# Altium PCB PCB1.PcbDoc
Units mil, origin at the board's own origin, x right, y up, seen from the top; angles counter-clockwise.
Board outline 728.35 x 1259.84 mil, 2 copper layers (Top Layer, Bottom Layer); 18 components, 0 nets, 43 pads, 32 vias.
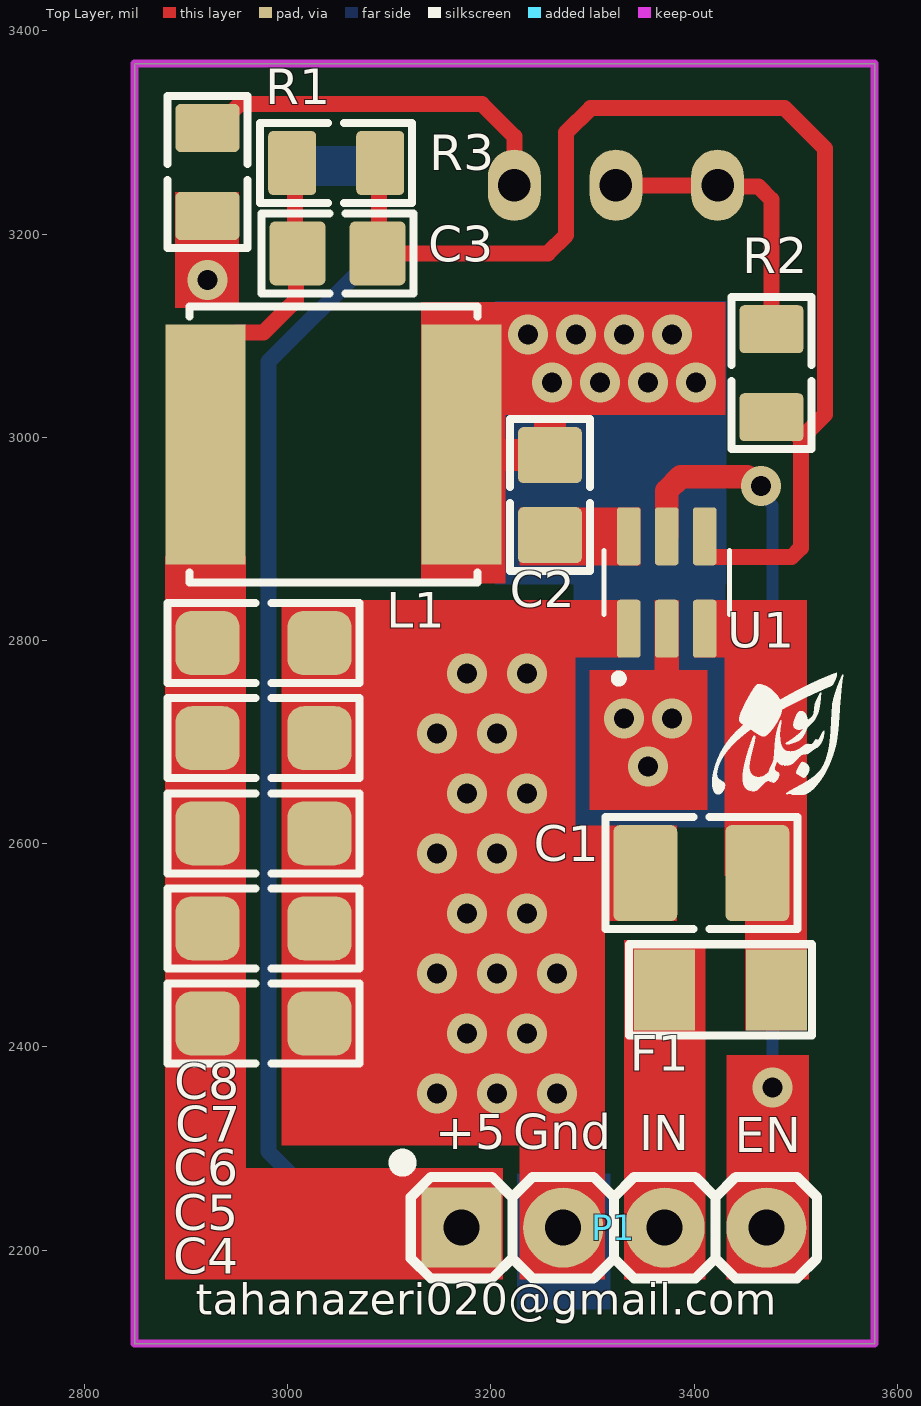
[diagram p0: Top Layer view]
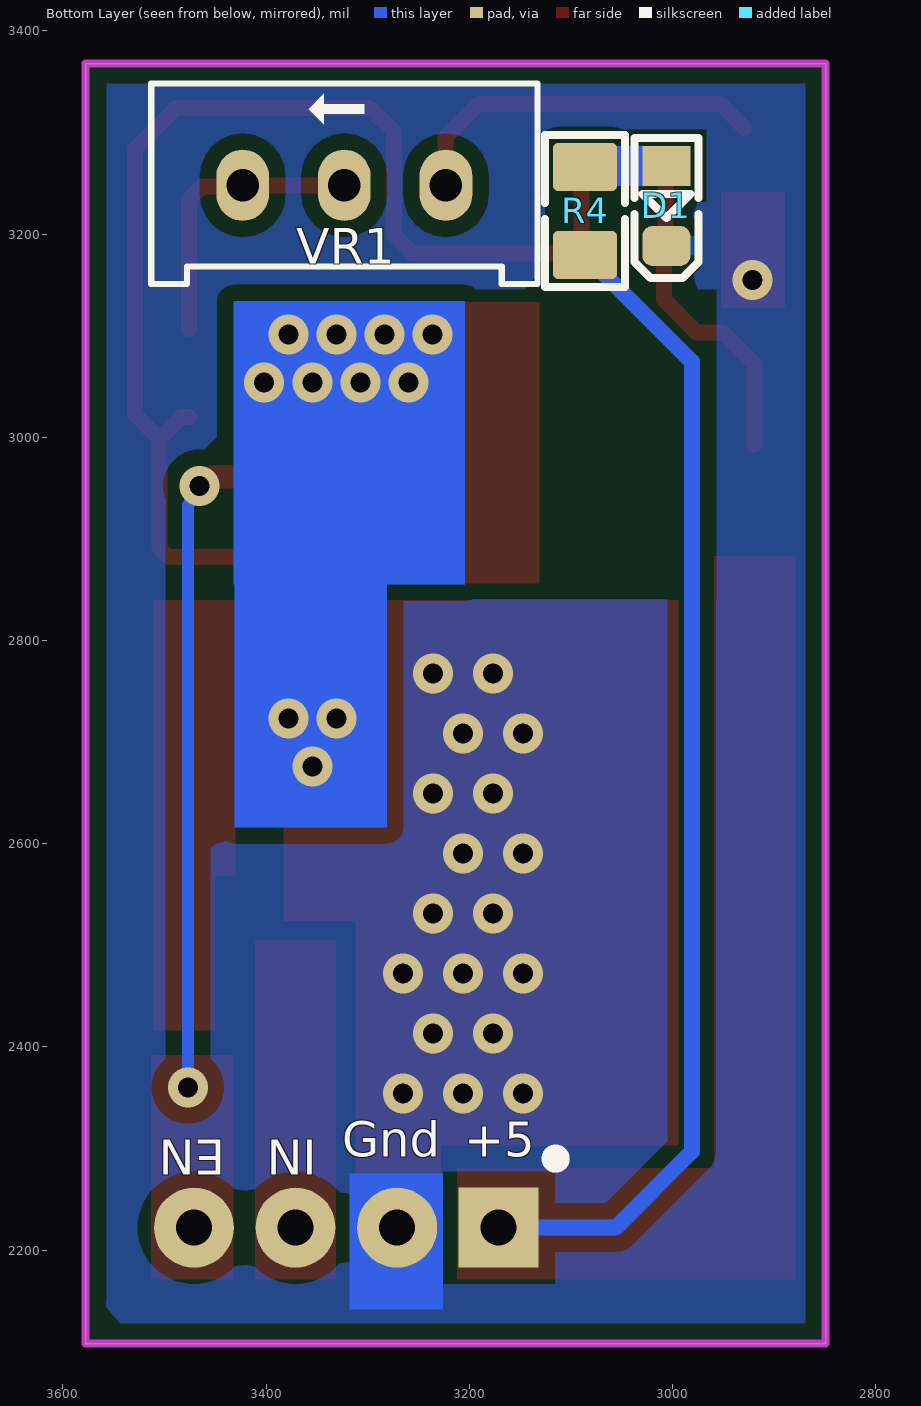
[diagram p1: Bottom Layer view, seen from below]

## Layer stack, top to bottom
Top Solder: solder mask 0.4, Solder Resist, Dk 3.5
Top Layer: signal copper 1.4
Dielectric 1: dielectric 12.6, FR-4, Dk 4.8
Bottom Layer: signal copper 1.4
Bottom Solder: solder mask 0.4, Solder Resist, Dk 3.5

## Board outline
2849.34,2108 3577.69,2108 3577.69,3367.84 2849.34,3367.84

## Design rules (kind name [scope] priority, off if disabled: settings)
Clearance [All] p1: gap=10 ignorepadtopadclearanceinfootprint=FALSE
PolygonConnect [All] p1: connectstyle=Relief reliefconductorwidth=10 reliefentries=4 polygonreliefangle="90 Angle" airgapwidth=10
RoutingVias [All] p1: holewidth=28 width=50 viastyle="Through Hole" minholewidth=28 minwidth=50 maxholewidth=28 maxwidth=50
SolderMaskExpansion [All] p1: expansion=4 istentingtop=FALSE
Width [All] p1: maxlimit=10 minlimit=10 preferedwidth=10
30 further rules are at their usual default settings.

## Components (designator, comment, footprint, x,y, rotation, side; value= is the part's Value field where it differs from the comment)
C1 "Capacitor SMD 1206" C1206E 3407,2571 r0 top value=10uF
C2 "Capacitor SMD 0805" C0805E 3258,2943 r270 top value=100nf
C3 "Capacitor SMD 0805" C0805E 3049,3181 r180 top value=47pF
C4 "Capacitor SMD 1206" C1206 2976.13,2423 r180 top value=10uF
C5 "Capacitor SMD 1206" C1206 2976.13,2516.61 r180 top value=10uF
C6 "Capacitor SMD 1206" C1206 2976.13,2610.23 r180 top value=10uF
C7 "Capacitor SMD 1206" C1206 2976.13,2703.84 r180 top value=10uF
C8 "Capacitor SMD 1206" C1206 2976.13,2797.46 r180 top value=10uF
D1 "LED SMD 0805" "LED SMD 0805 (Blue)" 3006,3227.63 r270 bottom
F1 "Resistor SMD 1206" SMD-1206-RES 3426,2456 r90 top value=3A
L1 "Inductor SMD Cored" L7 3045.02,2993 r180 top value=15uH
P1 "Male Header Single 04" MHDR1X04-254P 3171,2222 r0 top
R1 "Resistor SMD 0805" R0805E 3047.69,3270 r180 top value=100K
R2 "Resistor SMD 0805" R0805E 3476,3063 r90 top value=1K
R3 "Resistor SMD 0805" R0805E 2921,3261 r90 top value=1K
R4 "Resistor SMD 0805" R0805E 3086,3222.69 r270 bottom value=10K
U1 "TPS54202DDCR" SOT95P280X110-6N 3373,2857 r90 top
VR1 "Potentiometr Trimer / Multi Turn THD" 3296W 3323,3248 r0 bottom value=10K

## Footprints (in the part's own frame and the unit in brackets; to place one, negate y for a bottom-side part, rotate by r counter-clockwise, add the part's x,y. Pads: shape width x height; smd on the part's side, far side on the other; paste and mask are expansions set on the pad)
3296W [mil] "(Make www.tarahiboard.com)"
  oval 52x70 hole 32: 1(-100,0) 2(0,0) 3(100,0)
  silkscreen extent -190,-100 190,97, body extent -187,-96 188,94, height 455
C0805E [mm] "CHIP Capacitor, 2.0X1.3mm, 0805, EXPANDED PAD (Make www.tarahiboard.com)"
  rrect20% 1.4x1.6 smd mask+0.1: 1(-1,0) 2(1,0)
  silkscreen extent -1.9,-1 1.9,1, body extent -1,-0.62 1,0.63, height 1
C1206 [mm] "CHIP Capacitor, 3.2X1.6mm, 1206 (Make www.tarahiboard.com)"
  rrect50% 1.6x1.6 smd mask+0.075: 1(-1.4,0) 2(1.4,0)
  silkscreen extent -2.4,-1 2.4,1, body extent -1.6,-0.8 1.6,0.8, height 1
C1206E [mm] "CHIP Capacitor, 3.2X1.6mm, 1206, EXPANDED PAD (Make www.tarahiboard.com)"
  rrect20% 1.6x2.4 smd mask+0.075: 1(-1.4,0) 2(1.4,0)
  silkscreen extent -2.4,-1.4 2.4,1.4, body extent -1.6,-0.8 1.6,0.8, height 1
L7 [mm] "7.2*6.9mm, 7.1*6.5mm, (Make www.tarahiboard.com)"
  rect 2x6 smd: 1(-3.2,0) 2(3.2,0)
  silkscreen extent -3.6,-3.45 3.6,3.45, body extent -3.62,-3.35 3.63,3.35, height 3
"LED SMD 0805 (Blue)" [mm] "(Make www.tarahiboard.com)"
  rect 1x1.2 smd mask+0.075: 1(-1,0)
  rrect50% 1x1.2 smd mask+0.075: 2(1,0)
  silkscreen extent -1.7,-0.8 1.8,0.8, body extent -1,-0.63 1,0.63, height 0.7
MHDR1X04-254P [mm] "Male Header 1X04 with 2.54 mm Pitch (Make www.tarahiboard.com)"
  rect 2x2 hole 0.9: 1(0,0)
  round 2 hole 0.9: 2(2.54,0) 3(5.08,0) 4(7.62,0)
  silkscreen extent -1.27,-1.27 8.89,1.27, body extent -1.27,-1.27 8.89,1.27, height 8.43
R0805E [mm] "CHIP RESISTOR 1/8 WATT ,2.0X1.3mm, 0805, EXPANDED PAD (Make www.tarahiboard.com)"
  rrect20% 1.2x1.6 smd mask+0.1: 1(-1.1,0) 2(1.1,0)
  Top Layer pour cut-out: -0.5,0.8 0.5,0.8 0.5,-0.8 -0.5,-0.8
  silkscreen extent -1.9,-1 1.9,1, body extent -1.15,-0.67 1.15,0.68, height 0.76
SMD-1206-RES [mil] "(Make www.tarahiboard.com)"
  rect 80x60 smd: 1(0,55) 2(0,-55)
  silkscreen extent -45,-90 45,90, body extent -34,-66 34,66, height 33
SOT95P280X110-6N [mm]
  rrect25% 1.45x0.59 smd mask+0.102: 1(-1.155,0.95) 2(-1.155,0) 3(-1.155,-0.95) 4(1.155,-0.95) 5(1.155,0) 6(1.155,0.95)
  silkscreen extent -2.5,-1.57 0.8,1.57, body extent -1.4,-1.45 1.4,1.45, height 1.1

## Part data
C1 C4 C5 C6 C7 C8: "Capacitor C SMD 1206", ComponentLink1Description=Tarahiboard, ComponentLink1URL=https://www.tarahiboard.com, DatasheetVersion=2022
C2 C3: "Capacitor C SMD 0805", ComponentLink1Description=Tarahiboard, ComponentLink1URL=https://www.tarahiboard.com, DatasheetVersion=2022
P1: "Male, pitch: 2.54mm", ComponentLink1Description=Tarahiboard, ComponentLink1URL=https://www.tarahiboard.com/product/library-pack, DatasheetVersion=2022
U1: Package=None, Availability=Unavailable, MF="{'manufacturer': u'Texas Instruments'}", MP=TPS54202DDCR, Price=None
D1 L1 VR1: ComponentLink1Description=Tarahiboard, ComponentLink1URL=https://www.tarahiboard.com/product/library-pack, DatasheetVersion=2022
F1 R1 R2 R3 R4: ComponentLink1Description="Website: Tarahiboard", ComponentLink1URL=https://www.tarahiboard.com/product/library-pack, DatasheetVersion=2022

## Via types
v1: diameter 39.37, hole 19.68, Top Layer to Bottom Layer, 32 vias

## Nets (pads, with @x,y where several pads share a name; then routed paths per layer and width w, separated by ;. In a path a pad name is that pad's centre, name@x,y a point inside that pad or via, vN(x,y) a via of type N, cw(c..) or ccw(c..) an arc to the next point about the centre after c; other vN are vias at no path point)
pads on no net: C1.1 C1.2 C2.1 C2.2 C3.1 C3.2 C4.1 C4.2 C5.1 C5.2 C6.1 C6.2 C7.1 C7.2 C8.1 C8.2 D1.1 D1.2 F1.1 F1.2 L1.1 L1.2 P1.1 P1.2 P1.3 P1.4 R1.1 R1.2 R2.1 R2.2 R3.1 R3.2 R4.1 R4.2 U1.1 U1.2 U1.3 U1.4 U1.5 U1.6 VR1.1 VR1.2 VR1.3
copper on no net: | length 4471.6
  Top Layer w11.81: 3471,2336 3477,2342 v1(3477,2360)
  Top Layer w15.75: 2919.03,2993 2919.03,3071.5 2950.53,3103 2976,3103 3008.11,3135.11 3008.11,3178.59 ; 2928.87,3304.31 2952.57,3328 3191,3328 3223.16,3295.84 3223.16,3248.16 3223,3248 ; 3004.39,3270 3007.01,3267.38 3007.01,3179.68 3008.11,3178.59 ; 3009.63,3177.06 3008.11,3178.59 ; 3009.63,3181 3008.11,3179.48 3008.11,3178.59 ; 3087.37,3181 3089.69,3183.32 3089.69,3268.69 3091,3270 ; 3088.37,3181 3256,3181 3274,3199 3274,3300 3298,3324 3489,3324 3529,3284 3529,3022.57 3505,2998.57 ; 3323,3248 3423,3248 3424.4,3246.6 3463.4,3246.6 3476,3234 3476,3106.31 ; 3410.4,2902.47 3410.4,2885.74 3414.14,2882 3495.78,2882 3505,2891.22 3505,2998.57 ; 3483.87,3019.69 3476,3019.69 3483.87,3019.69 ; 3483.87,3019.69 3505,2998.57 ; 3483.87,3019.69 3505,2998.57
  Top Layer w19.68: 3171,2993 3181.63,2982.37 ; 3258,2903.63 3258.58,2903.05 ; v1@3258,3037.84 3300.66,3080.5 3313,3080.5 ; 3335.02,2903.05 3335.6,2902.47
  Top Layer w23.23: 3373,2902.47 3373,2947.39 3386.61,2961 3452.35,2961 3461.26,2952.09 v1(3465.63,2952.09)
  Top Layer w31.5: 3171,2993 3181.63,2982.37 3258,2982.37 ; 3258,2993 v1@3258,3037.84
  Bottom Layer w11.81: v1(3465.63,2952.09) 3465.63,2944.63 3477,2933.26 v1(3477,2360)
  Bottom Layer w15.75: 3090,3170 3076.61,3170 2981,3074.39 2981,2297 3056,2222 3171,2222
  Bottom Layer w39.37: 3006,3267 3085,3267 3086,3266
  other v1: 3146.85,2353.94 3205.91,2353.94 3264.96,2353.94 3176.38,2412.99 3235.43,2412.99 3146.85,2472.05 3205.91,2472.05 3264.96,2472.05 3176.38,2531.1 3235.43,2531.1 3146.85,2590.16 3205.91,2590.16 3176.38,2649.21 3235.43,2649.21 3354.38,2675.76 3146.85,2708.27 3205.91,2708.27 3330.76,2723 3378,2723 3176.38,2767.32 3235.43,2767.32 3259.89,3053.71 3307.13,3053.71 3354.38,3053.71 3402,3054 3236.27,3100.95 3283.51,3100.95 3330.76,3100.95 3378,3100.95 2921,3155

## Polygon pours and split planes (outlines as drawn)
no net on Bottom Layer "NONET_L-01_P-001" (solid, remove dead copper, pour order 0): 2849,3374 3557,3374 3557,2156 3557.66,2130 3557,2108 2846.93,2108

## Keep-outs
Keep-Out Layer:
  the board outline again, w7.87

## Other copper
Top Layer:
  rectangle: 3361,2733 3385,2840
  rectangle: 3297,2633 3413,2771
  rectangle: 3400,2783 3475,2840
  rectangle: 3184,2783 3328,2840
  rectangle: 3432,2171 3513,2392
  rectangle: 2879,2171 3212,2281
  rectangle: 2879,2173 2959,2883
  rectangle: 3131,2856 3214.48,3133
  rectangle: 3195,3022 3431,3133
  rectangle: 2994,2303 3283,2840
  rectangle: 3450,2416 3511,2592
  rectangle: 3331,2171 3411,2505
  rectangle: 3228,2171 3312,2526
  rectangle: 3257,2524 3383,2618
  rectangle: 2889,3127 2952,3241.32
  rectangle: 3228,2874 3347,2931
  rectangle: 3430,2568 3511,2840
Bottom Layer:
  rectangle: 3204,2855 3432,3134
  rectangle: 3281,2616 3431,3134
  rectangle: 3225.76,2141.3 3317.79,2275.3
  pour cut-out: 2957,3145.35 3435,3145.35 3435,2927 3429,2927 3429,2623 3286,2623 3282,2627 3282,2841 2957,2841

## Silkscreen, mask and mechanical layers (free items; w line width, h text height)
Top Overlay:
  drawing of 8 lines, arcs and shapes, not listed
  text "+5" at 3145,2287.71 h59.06
  text "Gnd" at 3222,2287.71 h59.06
  text "IN" at 3346,2287 h59.06
  text "EN" at 3440,2285 h59.06
  text "tahanazeri020@gmail.com" at 2909.57,2126.09 h53.15
Bottom Overlay:
  circle w19.68: c3115,2290 r3.94
  text "IN" at 3350,2320 h59.06 r180
  text "EN" at 3440,2320 h59.06 r180
  text "+5" at 3205,2280.71 h59.06
  text "Gnd" at 3325,2280.71 h59.06